# EAGLE board joe-breakout (EAGLE 6.1)
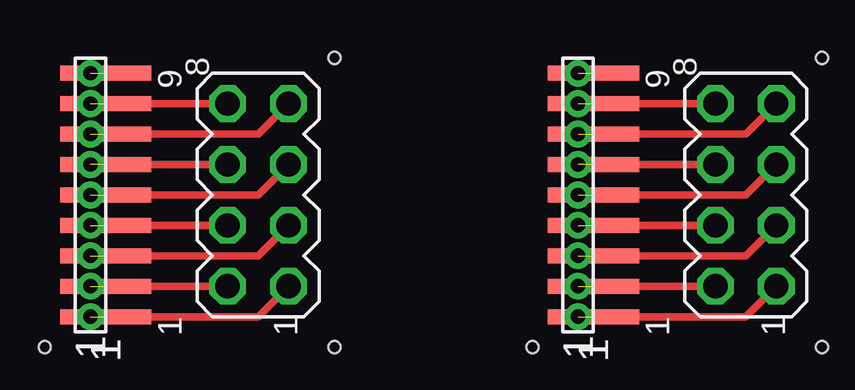
[diagram p0: board, top side]

No outline drawn. Coordinates in mm, seen from the top.
Copper layers (1*16): Top 0.035mm / dielectric 1.5mm / Bottom 0.035mm
Design rules: minimum track width 6mil, minimum drill 12mil, track to track 12mil, track to pad 12mil, pad to pad 6mil, via to via 10mil, smd to smd 0mil, copper to edge 12mil, drill to drill 10mil, minimum pad ring 10mil, minimum via ring 6mil, stop-mask expansion 2mil, vias tented up to drill 100mil, thermal gap 12mil
Holes 0.5 mm at 38.1,49.53 38.1,37.47 26.04,37.47 58.42,49.53 58.42,37.47 46.35,37.47

## Footprints (pad centres in the part's own frame; a part is rotated, then mirrored left to right if it is on the bottom)
MA09-1-05-SMD_LG = smd 3.81 x 0.635: 1 0,-5.08; 2 0,-3.81; 3 0,-2.54; 4 0,-1.27; 5 0,0; 6 0,1.27; 7 0,2.54; 8 0,3.81; 9 0,5.08
MA04-2-NOTXT = drill 1.016 octagon: 1 -3.81,-1.27; 2 -3.81,1.27; 3 -1.27,-1.27; 4 -1.27,1.27; 5 1.27,-1.27; 6 1.27,1.27; 7 3.81,-1.27; 8 3.81,1.27
MA09-1-0.05-RG = drill 0.6 pad 1.016: 1 -5.08,0; 2 -3.81,0; 3 -2.54,0; 4 -1.27,0; 5 0,0; 6 1.27,0; 7 2.54,0; 8 3.81,0; 9 5.08,0

## Placement (x,y rotation side)
J1  [MA09-1-05-SMD_LG]  48.9,43.81 0 top
J2  FE04-2  [MA04-2-NOTXT]  55.24,43.81 90 top
J3  [MA09-1-05-SMD_LG]  28.57,43.81 0 top
J4  [MA09-1-0.05-RG]  48.26,43.81 90 top
J10  FE04-2  [MA04-2-NOTXT]  34.92,43.81 90 top
J14  [MA09-1-0.05-RG]  27.94,43.81 90 top

## Library data of the parts
J1-J4 J10 J14 = con-lstb

## Nets
GND: J3.6 J10.6 J14.6
GND1: J1.6 J2.6 J4.6
N$1: J3.1 J10.1 J14.1
N$2: J3.2 J10.2 J14.2
N$3: J3.3 J10.3 J14.3
N$4: J3.4 J10.4 J14.4
N$5: J3.5 J10.5 J14.5
N$6: J1.1 J2.1 J4.1
N$7: J3.7 J10.7 J14.7
N$8: J3.8 J10.8 J14.8
N$9: J1.2 J2.2 J4.2
N$10: J1.3 J2.3 J4.3
N$11: J1.4 J2.4 J4.4
N$12: J1.5 J2.5 J4.5
N$13: J1.7 J2.7 J4.7
N$14: J1.8 J2.8 J4.8
N$15: J1.9 J4.9
N$18: J3.9 J14.9

## Tracks (layer width: path | path; a pad name or v marks a point on that pad's centre or on a via)
GND  (1 unrouted)
  Top 0.305: J14.6 J10.6
GND1  (1 unrouted)
  Top 0.305: J4.6 J2.6
N$1  (1 unrouted)
  Top 0.305: J14.1 34.92,38.73 J10.1
N$2  (1 unrouted)
  Top 0.305: J14.2 J10.2
N$3  (1 unrouted)
  Top 0.305: J14.3 34.92,41.27 J10.3
N$4  (1 unrouted)
  Top 0.305: J14.4 J10.4
N$5  (1 unrouted)
  Top 0.305: J14.5 34.92,43.81 J10.5
N$6  (1 unrouted)
  Top 0.305: J4.1 55.24,38.73 J2.1
N$7  (1 unrouted)
  Top 0.305: J14.7 34.92,46.35 J10.7
N$8  (1 unrouted)
  Top 0.305: J14.8 J10.8
N$9  (1 unrouted)
  Top 0.305: J4.2 J2.2
N$10  (1 unrouted)
  Top 0.305: J4.3 55.24,41.27 J2.3
N$11  (1 unrouted)
  Top 0.305: J4.4 J2.4
N$12  (1 unrouted)
  Top 0.305: J4.5 55.24,43.81 J2.5
N$13  (1 unrouted)
  Top 0.305: J4.7 55.24,46.35 J2.7
N$14  (1 unrouted)
  Top 0.305: J4.8 J2.8
N$15  (1 unrouted)
N$18  (1 unrouted)

## Text on the board
tNames: 8 | 8 | 9 | 9 | 1 | 1 | 1 | 1